# EAGLE board medipix (EAGLE 6.4)
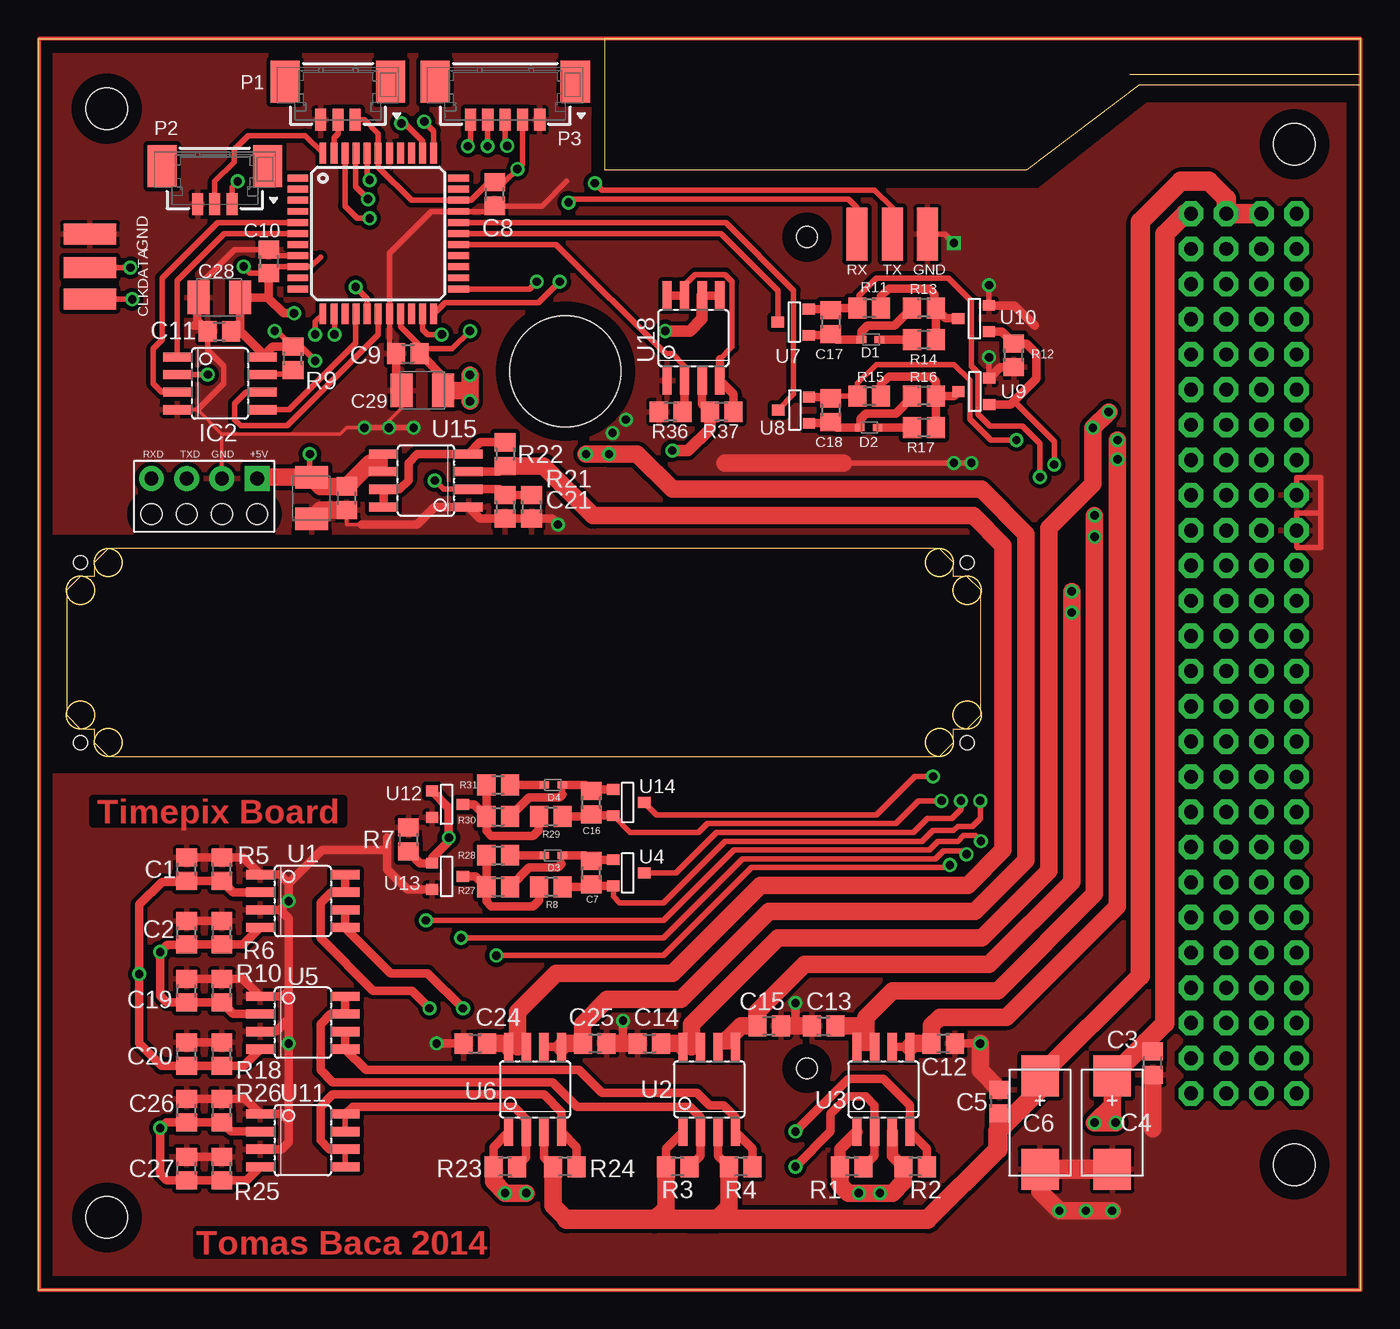
[diagram p0: board, top side]
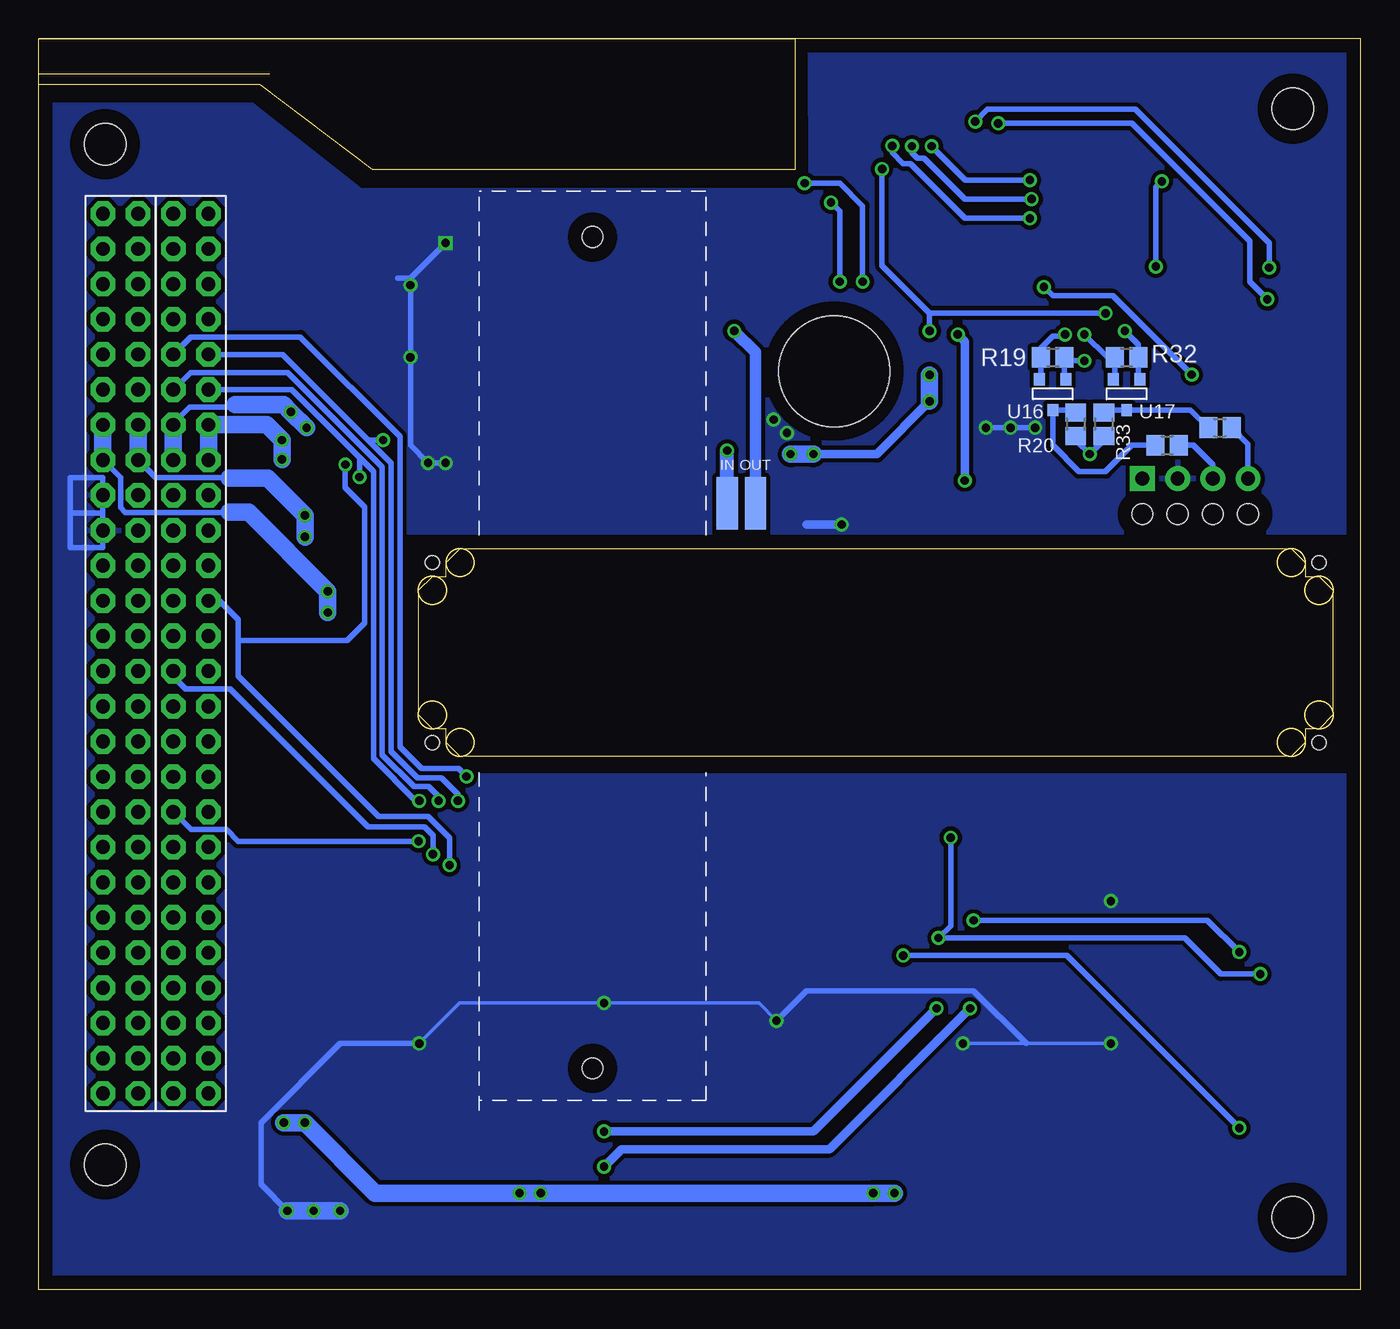
[diagram p1: board, bottom side, seen from below]

Size 95.4 x 90.3 mm. Coordinates in mm from the lower left corner, seen from the top.
Outline: 0,0 95.4,0 95.4,90.3 0,90.3 0,0
Copper layers (1*16): Top 0.034mm / dielectric 1.2mm / Bottom 0.034mm
Design rules "default *": minimum track width 0.12mm, minimum drill 0.2mm, track to track 0.12mm, track to pad 0.12mm, pad to pad 0.12mm, via to via 0.3mm, smd to smd 0.12mm, copper to edge 40mil, drill to drill 8mil, minimum pad ring 10mil, minimum via ring 8mil, stop-mask expansion 4mil, vias tented up to drill 0mil, thermal gap 10mil
Holes 3 mm at 4.9,85.25 4.91,5.23 90.63,9.04 90.63,82.7
Holes 1 mm at 3,39.5 67,39.5 3,52.5 67,52.5
Holes 8 mm at 38,66.3
Holes 1.5 mm at 55.45,16 55.45,76
Milling: area 40.8,80.8 to 95.4,90.3; area 4,38.5 to 6,40.5; area 64,38.5 to 66,40.5; area 4,51.5 to 6,53.5; area 4,51.5 to 6,53.5; area 2,49.5 to 4,51.5; area 2,40.5 to 4,42.5; area 64,51.5 to 66,53.5; area 66,49.5 to 68,51.5; area 66,40.5 to 68,42.5; area 2,38.5 to 68,53.5; 2 lines

## Footprints (pad centres in the part's own frame; a part is rotated, then mirrored left to right if it is on the bottom)
R0805 = smd 1.3 x 1.5: 1 -0.85,0; 2 0.85,0
D = smd 2.95 x 2.7: + 3.375,0; - -3.375,0
SMC_B = smd 1.6 x 2.4: + -1.5,0; - 1.5,0
PIN = smd 1.524 x 3.81: P$1 0,0
SOD523 = smd 0.7 x 0.5: A 0.7,0; C -0.6,0
H-KONEKTOR = drill 1 pad 1.778 octagon: 1 0,0; 2 2.54,0; 3 0,-2.54; 4 2.54,-2.54; 5 0,-5.08; 6 2.54,-5.08; 7 0,-7.62; 8 2.54,-7.62; 9 0,-10.16; 10 2.54,-10.16; 11 0,-12.7; 12 2.54,-12.7; 13 0,-15.24; 14 2.54,-15.24; 15 0,-17.78; 16 2.54,-17.78; 17 0,-20.32; 18 2.54,-20.32; 19 0,-22.86; 20 2.54,-22.86; 21 0,-25.4; 22 2.54,-25.4; 23 0,-27.94; 24 2.54,-27.94; 25 0,-30.48; 26 2.54,-30.48; 27 0,-33.02; 28 2.54,-33.02; 29 0,-35.56; 30 2.54,-35.56; 31 0,-38.1; 32 2.54,-38.1; 33 0,-40.64; 34 2.54,-40.64; 35 0,-43.18; 36 2.54,-43.18; 37 0,-45.72; 38 2.54,-45.72; 39 0,-48.26; 40 2.54,-48.26; 41 0,-50.8; 42 2.54,-50.8; 43 0,-53.34; 44 2.54,-53.34; 45 0,-55.88; 46 2.54,-55.88; 47 0,-58.42; 48 2.54,-58.42; 49 0,-60.96; 50 2.54,-60.96; 51 0,-63.5; 52 2.54,-63.5
TQFP44 = smd 1.5 x 0.5: 1 -5.8,4; 2 -5.8,3.2; 3 -5.8,2.4; 4 -5.8,1.6; 5 -5.8,0.8; 6 -5.8,0; 7 -5.8,-0.8; 8 -5.8,-1.6; 9 -5.8,-2.4; 10 -5.8,-3.2; 11 -5.8,-4; 23 5.8,-4; 24 5.8,-3.2; 25 5.8,-2.4; 26 5.8,-1.6; 27 5.8,-0.8; 28 5.8,0; 29 5.8,0.8; 30 5.8,1.6; 31 5.8,2.4; 32 5.8,3.2; 33 5.8,4 | smd 0.5 x 1.5: 12 -4,-5.8; 13 -3.2,-5.8; 14 -2.4,-5.8; 15 -1.6,-5.8; 16 -0.8,-5.8; 17 0,-5.8; 18 0.8,-5.8; 19 1.6,-5.8; 20 2.4,-5.8; 21 3.2,-5.8; 22 4,-5.8; 34 4,5.8; 35 3.2,5.8; 36 2.4,5.8; 37 1.6,5.8; 38 0.8,5.8; 39 0,5.8; 40 -0.8,5.8; 41 -1.6,5.8; 42 -2.4,5.8; 43 -3.2,5.8; 44 -4,5.8
SOIC08 = smd 0.66 x 2.032: 1 -1.905,-3.073; 2 -0.635,-3.073; 3 0.635,-3.073; 4 1.905,-3.073; 5 1.905,3.073; 6 0.635,3.073; 7 -0.635,3.073; 8 -1.905,3.073
MEDIPIX_CONNECTOR = drill 1 pad 1.8 square: 5V 7.62,0 | drill 1 pad 1.8: GND 5.08,0; P$3 2.54,0; P$4 0,0 | hole 1.5: 0,-2.54; 2.54,-2.54; 5.08,-2.54; 7.62,-2.54
53398-0310 = smd 0.8 x 1.6: 1 1.25,0; 2 0,0; 3 -1.25,0 | smd 2.1 x 3: M1 3.81,2.75; M2 -3.81,2.75
53398-0510 = smd 0.8 x 1.6: 1 2.5,0; 2 1.25,0; 3 0,0; 4 -1.25,0; 5 -2.5,0 | smd 2.1 x 3: M1 5.06,2.75; M2 -5.06,2.75
SOT-23 = smd 0.787 x 0.889: 1 -0.953,-0.953; 2 0.953,-0.953; 3 0,1.27

## Placement (x,y rotation side)
C1  100n  [R0805]  10.67,30.35 90 top
C2  100n  [R0805]  10.67,25.78 90 top
C3  100n  [R0805]  80.39,16.38 90 top
C4  220u  [D]  77.47,12.06 90 top
C5  100n  [R0805]  69.34,13.59 270 top
C6  220u  [D]  72.26,12.06 90 top
C7  15nF  [R0805]  39.88,30.1 90 top
C8  100n  [R0805]  32.9,79.09 90 top
C9  100n  [R0805]  26.64,67.57 0 top
C10  100n  [R0805]  16.6,74.23 270 top
C11  100n  [R0805]  13.04,69.19 0 top
C12  100n  [R0805]  65.28,17.78 180 top
C13  100n  [R0805]  56.64,19.05 0 top
C14  100n  [R0805]  44.07,17.78 0 top
C15  100n  [R0805]  52.7,19.05 180 top
C16  15nF  [R0805]  39.88,35.18 90 top
C17  15nF  [R0805]  57.15,69.85 270 top
C18  15nF  [R0805]  57.15,63.5 270 top
C19  100n  [R0805]  10.67,21.59 90 top
C20  100n  [R0805]  10.67,17.02 90 top
C21  100n  [R0805]  35.56,56.52 270 top
C22  100u  [SMC_B]  19.68,57.15 270 top
C23  100n  [R0805]  22.23,57.15 90 top
C24  100n  [R0805]  31.5,17.78 0 top
C25  100n  [R0805]  40.13,17.78 180 top
C26  100n  [R0805]  10.67,12.95 90 top
C27  100n  [R0805]  10.67,8.76 90 top
C28  100u  [SMC_B]  13.03,71.63 180 top
C29  100u  [SMC_B]  27.69,64.92 180 top
CLK  CLK  [PIN]  3.68,71.5 90 top
D1  BAS70  [SOD523]  60.07,68.58 180 top
D2  BAS70  [SOD523]  59.94,62.23 180 top
D3  BAS70  [SOD523]  37.08,31.37 0 top
D4  BAS70  [SOD523]  37.08,36.45 0 top
DATA  DATA  [PIN]  3.68,73.79 270 top
GND  GND  [PIN]  3.68,76.2 270 top
GND1  GND  [PIN]  64.14,76.2 180 top
H1  H1  [H-KONEKTOR]  83.16,14.18 180 bottom
H2  H2  [H-KONEKTOR]  88.24,14.18 180 bottom
IC1  AVR_XMEGA_A4U44A  [TQFP44]  24.5,76.24 0 top
IC2  FM25H20  [SOIC08]  13.06,65.43 270 top
MP  MEDIPIX_CONNECTOR  [MEDIPIX_CONNECTOR]  8.13,58.55 0 top
P1  53398-0310  [53398-0310]  21.59,84.45 0 top
P2  53398-0310  [53398-0310]  12.7,78.36 0 top
P3  53398-0510  [53398-0510]  33.66,84.45 0 top
R1  100k  [R0805]  58.67,8.89 180 top
R2  100k  [R0805]  63.25,8.89 180 top
R3  100k  [R0805]  46.1,8.89 180 top
R4  100k  [R0805]  50.67,8.89 180 top
R5  100k  [R0805]  13.21,30.35 90 top
R6  100k  [R0805]  13.21,25.78 90 top
R7  100k  [R0805]  26.67,32.51 270 top
R8  100k  [R0805]  36.96,29.08 180 top
R9  100k  [R0805]  18.35,67.23 90 top
R10  100k  [R0805]  13.21,21.59 90 top
R11  100k  [R0805]  59.94,70.87 0 top
R12  100k  [R0805]  70.36,67.46 90 top
R13  330k  [R0805]  63.88,70.87 180 top
R14  1k5  [R0805]  63.88,68.58 180 top
R15  100k  [R0805]  59.94,64.52 0 top
R16  330k  [R0805]  63.88,64.52 180 top
R17  1k5  [R0805]  63.88,62.23 180 top
R18  100k  [R0805]  13.21,17.02 90 top
R19  10k  [R0805]  22.23,67.31 0 bottom
R20  10k  [R0805]  20.57,62.48 270 bottom
R21  100k  [R0805]  33.66,56.52 270 top
R22  100k  [R0805]  33.66,60.33 270 top
R23  100k  [R0805]  33.66,8.89 180 top
R24  100k  [R0805]  37.97,8.89 180 top
R25  100k  [R0805]  13.21,8.76 90 top
R26  100k  [R0805]  13.21,12.95 90 top
R27  330k  [R0805]  33.15,29.08 0 top
R28  1k5  [R0805]  33.15,31.37 0 top
R29  100k  [R0805]  36.96,34.16 180 top
R30  330k  [R0805]  33.15,34.16 0 top
R31  1k5  [R0805]  33.15,36.45 0 top
R32  10k  [R0805]  16.89,67.31 0 bottom
R33  10k  [R0805]  18.54,62.48 270 bottom
R34  1k  [R0805]  10.16,62.23 0 bottom
R35  1k  [R0805]  13.97,60.96 0 bottom
R36  100k  [R0805]  45.59,63.37 180 top
R37  100k  [R0805]  49.28,63.37 180 top
RXD0  RX  [PIN]  59.05,76.2 180 top
TXD0  TX  [PIN]  61.59,76.2 180 top
TXD1  IN  [PIN]  45.72,56.77 0 bottom
TXD2  OUT  [PIN]  43.69,56.77 0 bottom
U1  IRF7313  [SOIC08]  19.05,28.07 270 top
U2  IRF7328  [SOIC08]  48.39,14.48 0 top
U3  IRF7328  [SOIC08]  60.96,14.48 0 top
U4  BSS84  [SOT-23]  42.42,30.1 270 top
U5  IRF7313  [SOIC08]  19.05,19.28 270 top
U6  IRF7328  [SOIC08]  35.81,14.48 0 top
U7  BSS84  [SOT-23]  54.61,69.85 90 top
U8  BSS84  [SOT-23]  54.64,63.5 90 top
U9  BSS138AKA  [SOT-23]  67.64,64.85 90 top
U10  BSS138AKA  [SOT-23]  67.61,70.1 90 top
U11  IRF7313  [SOIC08]  19.05,10.79 270 top
U12  BSS138AKA  [SOT-23]  29.34,35.05 270 top
U13  BSS138AKA  [SOT-23]  29.34,29.84 270 top
U14  BSS84  [SOT-23]  42.42,35.18 270 top
U15  IRF7319  [SOIC08]  27.94,58.42 90 top
U16  BSS138AKA  [SOT-23]  22.23,64.77 180 bottom
U17  BSS138AKA  [SOT-23]  16.89,64.77 180 bottom
U18  IRF7319  [SOIC08]  47.24,68.71 0 top

## Library data of the parts
C1-C29 CLK D1-D4 DATA GND GND1 H1 H2 IC1 IC2 MP R1-R37 RXD0 TXD0 TXD1 TXD2 U1-U18 = medipix
P1-P3 = con-molex-picoblade

## Nets
+3.3V: C8.2 C9.2 C10.2 C11.2 C25.2 C28.+ C29.+ IC1.9 IC1.19 IC1.31 IC1.39 IC2.8 P1.1 P2.1 P3.2 R9.2 R19.2 R32.2 U6.5 U6.6 U16.1 U17.1
+3.3V-FIPEX: C14.2 H1.38 H1.40 U2.7 U2.8
+3.3V-IN: C5.2 C6.+ H1.52 H2.51 R3.2 R4.2 R24.2 U2.1 U2.3 U6.3
+3.3V-MEASURE: C15.2 H2.38 H2.40 U2.5 U2.6
+5V: C24.2 R22.2 U6.7 U6.8 U15.3
+5V-FIPEX: C12.2 H1.37 H1.39 U3.5 U3.6
+5V-IN: C3.2 C4.+ H1.51 R1.2 R2.2 R23.2 U3.1 U3.3 U6.1
+5V-MEASURE: C13.2 H2.37 H2.39 U3.7 U3.8
+5V-MEDIPIX: C22.+ C23.2 MP.5V R20.2 R33.2 U15.5 U15.6
CS: IC1.6 IC2.1
FIPEX-ON: C2.1 C19.1 H1.18 R6.1 R10.1 U1.4 U5.2
FIPEX_3_GATE: R3.1 U2.2 U5.7 U5.8
FIPEX_5_GATE: R2.1 U1.5 U1.6 U3.4
GNDD: C1.2 C2.2 C3.1 C4.- C5.1 C6.- C8.1 C9.1 C10.1 C11.1 C12.1 C13.1 C14.1 C15.1 C19.2 C20.2 C21.2 C22.- C23.1 C24.1 C25.1 C26.2 C27.2 C28.- C29.- GND1.P$1 GND.P$1 H2.34 H2.36 IC1.8 IC1.18 IC1.30 IC1.38 IC2.4 MP.GND P1.3 P2.3 P3.1 R5.2 R6.2 R7.1 R10.2 R12.1 R18.2 R21.2 R25.2 R26.2 R36.2 U1.1 U1.3 U5.1 U5.3 U9.2 U10.2 U11.1 U11.3 U12.2 U13.2 U15.1 U18.1
I2C-SCL-OBC: C16.1 C18.1 H1.43 R15.1 R29.1 U8.2 U14.2
I2C-SDA-OBC: C7.1 C17.1 H1.41 R8.1 R11.1 U4.2 U7.2
MEASURE-ON: C1.1 C20.1 H1.26 R5.1 R7.2 R18.1 U1.2 U5.4 U12.1 U13.1
MEASURE_3_GATE: R4.1 U2.4 U5.5 U5.6
MEASURE_5_GATE: R1.1 U1.7 U1.8 U3.2
MEDIPIX-SW: C21.1 IC1.21 R21.1 U15.2
MEDIPIX-SW2: IC1.27 R36.1 U18.2
MEDIPIX_GATE: R22.1 U15.4 U15.7 U15.8
MEDIPIX_GATE2: R37.1 U18.4 U18.7 U18.8
MISO: IC1.16 IC2.2
MOSI: IC1.15 IC2.5
MPX2.2IN: R37.2 TXD1.P$1 U18.3
MPX2.2OUT: TXD2.P$1 U18.5 U18.6
N$2: D3.C R28.2
N$3: C7.2 D3.A R27.2 U4.1
N$4: D2.C R17.2
N$5: D1.C R14.2
N$6: C17.2 D1.A R13.2 U7.1
N$7: C18.2 D2.A R16.2 U8.1
N$8: IC2.7 R9.1
N$9: MP.P$4 R34.2
N$10: IC1.23 TXD0.P$1
N$11: IC1.22 RXD0.P$1
N$17: D4.C R31.2
N$18: C16.2 D4.A R30.2 U14.1
PA0: IC1.40 P3.5
PA1: IC1.41 P3.4
PA2: IC1.42 P3.3
PA3: IC1.43 P1.2
PA4: IC1.44 P2.2
PA5: IC1.1
PA6: IC1.2
PA7: IC1.3
PDI_CLK: CLK.P$1 IC1.35
PDI_DATA: DATA.P$1 IC1.34
RXD0: IC1.12 R32.1 U17.2
RXDM: R20.1 R35.1 U16.3
RXDMMM: MP.P$3 R35.2
SCK: IC1.17 IC2.6
SCL: IC1.29 U8.3
SCL2_GATE: R29.2 R30.1 R31.1 U12.3
SCL-MEASURE: H1.44 U14.3
SCL_GATE: R15.2 R16.1 R17.1 U9.3
SDA: IC1.28 U7.3
SDA2_GATE: R8.2 R27.1 R28.1 U13.3
SDA-MEASURE: H1.42 U4.3
SDA_GATE: R11.2 R13.1 R14.1 U10.3
TIMEPIX-ON: C26.1 C27.1 H1.29 R12.2 R25.1 R26.1 U9.1 U10.1 U11.2 U11.4
TIMEPIX_3_GATE: R24.1 U6.4 U11.5 U11.6
TIMEPIX_5_GATE: R23.1 U6.2 U11.7 U11.8
TXD0: IC1.13 R19.1 U16.2
TXDM: R33.1 R34.1 U17.3
WP: IC1.5 IC2.3

## Tracks (layer width: path | path; a pad name or v marks a point on that pad's centre or on a via)
+3.3V  (via drill 0.6)
  Top 0.406: C10.2 17.05,73.84 IC1.9 19.61,73.84 20.32,74.55 | IC1.19 26.1,69.53 27.49,68.14 C9.2 | 14.28,69.19 C11.2 | 27.75,67.31 C9.2 | 16.6,72.3 C10.2 | C9.2 27.84,67.92 29.82,67.92 v31.11,69.22 | C8.2 32.49,79.94 31.2,78.64 IC1.31 26.89,78.64 24.5,81.03 IC1.39 24.5,83.45 23.5,84.45 P1.1 | C8.2 33.47,79.94 | C8.2 33.58,79.94 v34.54,80.9 34.91,81.26 P3.2 | v19.94,67.06 18.91,68.08 R9.2 17.21,69.22 v17.02,69.22 | 13.84,78.47 P2.1 13.95,79.61 v14.35,80.01 | C10.2 15.26,73.38 v14.78,73.86
  Top 0.61: U6.6 U6.5 | 27.75,67.31 29.19,65.88 C29.+ | C11.2 14.53,69.19 | 14.53,69.19 C28.+ 16.51,71.63 | 16.51,71.63 16.6,71.63 C10.2 | v18.41,70.48 17.65,70.48 16.51,71.63 | R9.2 16.88,68.08 IC2.8 16.14,67.58 14.53,69.19
  Top 1.27: U6.5 37.95,17.78 C25.2 39.24,17.82 39.24,19.18 41.02,20.95 46.35,20.95 52.7,27.3 67.56,27.3 71.25,30.99 71.25,54.56 68.02,57.78 45.72,57.78 43.18,60.33 v41.15,60.33 v39.5,60.33 | v31.11,64.14 v31.11,66.04 31.11,64.92 C29.+
  Bottom 0.406: v18.41,70.48 31.11,70.48 | v31.11,69.22 31.11,70.48 | 31.11,70.48 34.54,73.91 v34.54,80.9 | U16.1 21.38,65.83 R19.2 21.12,67.06 v19.94,67.06 | U17.1 16.04,65.83 R32.2 16.04,68.24 v17.02,69.22 | v14.78,73.86 14.78,79.58 v14.35,80.01
  Bottom 0.61: v31.11,64.14 34.92,60.33 v39.5,60.33
  Bottom 1.27: v31.11,66.04 v31.11,64.14 | v39.5,60.33 v41.15,60.33
+3.3V-FIPEX  (via drill 0.6)
  Top 0.406: U2.7 47.14,17.55 47.12,17.53
  Top 0.61: U2.8 U2.7 | 46.48,17.4 U2.8 | U2.8 46.51,17.53
  Top 1.27: U2.8 46.25,17.78 C14.2 | 47.12,17.53 47.12,19.18 53.34,25.4 68.07,25.4 72.9,30.23 72.9,54.99 76.07,58.17 v76.07,62.23 v77.22,63.37
  Bottom 0.406: 85.7,62.89 H1.40 85.7,62.51 84.51,63.7 81.84,63.7 81.64,63.91 79.63,63.91
  Bottom 1.27: H1.38 H1.40 | v76.07,62.23 v77.22,63.37 77.75,63.91 79.63,63.91 81.23,63.91
+3.3V-IN
  Top 0.61: R24.2 36.45,9.56 U6.3 | U2.3 49.02,9.69 R4.2 | U2.1 45.25,10.17 R3.2
  Top 1.27: R24.2 37.12,6.06 38.1,5.08 | 44.45,5.08 45.25,5.88 | 48.9,5.08 49.82,6.01 | 69.22,11.43 69.22,12.61 C5.2 | R3.2 45.25,5.08 46.99,5.08 | R4.2 49.82,5.08 48.26,5.08
  Top 1.422: H2.51 H1.52 85.7,78.77 84.45,80.01 82.42,80.01 79.5,77.09 79.5,22.68 C6.+ 72.26,14.48 69.22,11.43 69.22,10.16 64.14,5.08 48.9,5.08 48.26,5.08 47.62,5.08 46.99,5.08 44.45,5.08 38.1,5.08
+3.3V-MEASURE  (via drill 0.6)
  Top 0.406: U2.6 U2.5 49.66,17.55 49.66,18.03
  Top 1.27: 49.66,18.03 50.67,19.05 C15.2 51.82,19.09 51.82,20.07 55.24,23.5 68.58,23.5 74.55,29.46 74.55,29.59 74.55,32.38 v74.55,48.9 v74.55,50.42
  Bottom 0.406: 81.66,56.13 81.69,56.11 89.15,56.11 89.51,56.46 89.51,58.63 H2.38
  Bottom 1.27: v74.55,48.9 v74.55,50.42 80.26,56.13 80.39,56.13 81.28,56.13 81.66,56.13 | H2.38 H2.40
+5V
  Top 0.305: U6.8 33.93,17.53 34.54,17.53
  Top 0.406: U6.7 U6.8
  Top 0.61: U6.7 35.15,17.53 34.54,17.53 | U15.3 33.23,59.05 R22.2
  Top 1.27: U6.8 33.68,17.78 C24.2 | 34.54,17.53 34.54,20.07 37.34,22.86 45.72,22.86 52.07,29.21 67.06,29.21 69.6,31.75 69.6,53.72 67.44,55.88 40.01,55.88 36.41,59.48 R22.2
+5V-FIPEX  (via drill 0.6, 0.6 pad 0.41)
  Top 0.61: U3.6 U3.5
  Top 1.27: U3.5 63.09,17.78 C12.2 64.43,19.09 65.02,19.68 69.85,19.68 77.85,27.69 77.85,27.72 77.85,28.57 v77.85,59.94 v77.85,61.34
  Bottom 1.27: H1.37 H1.39 78.95,62.44 v77.85,61.34 v77.85,59.94
+5V-IN  (via drill 0.6)
  Top 0.406: U3.3 61.47,11.53
  Top 0.61: U6.1 32.8,10.3 R23.2
  Top 0.813: R2.2 61.59,9.69 U3.3 | U3.1 57.82,10.17 R1.2
  Top 1.27: R1.2 57.82,7.58 58.42,6.99 v59.18,6.99 v60.71,6.99 61.59,6.99 62.4,7.79 R2.2 | 77.47,12.06 v76.2,12.06 77.47,13.34 | 77.47,12.06 v77.72,12.06 | 77.47,13.34 C4.+ | v35.18,6.99 v33.66,6.99 32.8,7.83 R23.2 | C3.2 80.39,17.4 79.91,17.88 | 77.47,12.06 77.47,13.34
  Top 1.422: H1.51 82.76,77.68 81.28,76.2 81.28,19.25 79.91,17.88 C4.+
  Bottom 1.27: v77.72,12.06 v76.2,12.06 71.12,6.99 v60.71,6.99 v59.18,6.99 v35.18,6.99 v33.66,6.99
+5V-MEASURE  (via drill 0.6 pad 0.41)
  Top 0.406: 59.69,17.55 59.69,18.41
  Top 0.61: U3.8 59.69,17.55 U3.7 | 57.72,18.82 C13.2
  Top 1.27: 58.22,19.05 C13.2 59.05,19.05 59.69,18.41 59.69,19.68 61.59,21.59 69.22,21.59 76.2,28.57 v76.2,54.36 v76.2,55.91
  Bottom 0.406: 81.66,58.6 81.69,58.62 86.96,58.62 H2.37
  Bottom 1.27: v76.2,54.36 v76.2,55.91 78.89,58.6 81.66,58.6 | H2.37 H2.39
+5V-MEDIPIX  (via drill 0.6)
  Top 0.406: C22.+ 19.56,58.78 v19.56,60.33
  Top 0.61: U15.5 U15.6 24.23,59.69 24.13,59.69
  Top 1.27: MP.5V 15.85,58.65 C22.+ 20.34,58 C23.2 23.91,59.69 24.13,59.69
  Bottom 0.406: R33.2 18.54,61.34 v19.56,60.33 20.57,61.34 R20.2
CS
  Top 0.406: IC2.1 9.99,72.85 13.38,76.24 IC1.6
FIPEX-ON  (via drill 0.6)
  Top 0.406: 10.63,20.7 C19.1 | v27.94,26.67 45.09,26.67 50.16,31.75 64.26,31.75 64.9,32.38 66.32,32.38 66.73,32.79 67.59,32.79 v68,32.38
  Top 0.61: U1.4 14.75,24.93 R6.1 C2.1 10.63,24.89 9.27,24.89 v8.76,24.38 8.76,21.21 9.23,20.74 C19.1 R10.1 14.03,19.91 U5.2
  Bottom 0.406: 9.02,24.13 v8.76,24.38 11.05,26.67 v27.94,26.67 | H1.18 84.42,33.22 81.86,33.22 81.03,32.38 v68,32.38
FIPEX_3_GATE
  Top 0.61: R3.1 47.75,9.69 U2.2 47.75,12.45 46.99,13.21 38.86,13.21 37.08,14.99 21.21,14.99 20.32,15.88 20.32,19.18 21.06,19.91 U5.7 U5.8
FIPEX_5_GATE  (via drill 0.6)
  Top 0.61: U1.6 U1.5 | U1.5 22.25,26.29 | R2.1 64.1,10.17 U3.4 62.87,13.34 60.96,15.24 58.42,15.24 v54.61,11.43 | 22.23,26.16 U1.5 | v30.61,20.32 28.07,22.86 25.4,22.86 22.12,26.14 U1.5
  Bottom 0.61: v30.61,20.32 39.5,11.43 v54.61,11.43
GNDD  (via drill 0.6)
  Top 0.254: v18.03,17.78 18.03,20.32 | U10.2 68.57,71.13 | IC2.4 11.45,63.52 13.21,61.77 | MP.GND 13.21,61.77 | C29.- 26.19,63.65 24.77,62.23 24.13,62.23 v23.5,62.23 22.23,62.23 21.76,61.77 13.21,61.77 | C23.1 22.23,55.24 23.28,55.24
  Top 0.406: IC1.8 17.04,74.64 C10.1 14.12,75.08 11.53,72.49 C28.- | 11.45,63.52 13.34,65.41 13.34,66.67 12.19,67.82 C11.1 | 38.1,80.01 36.33,78.24 C8.1 32.51,77.84 IC1.30 28.31,77.84 25.3,74.83 IC1.18 25.3,68.06 C9.1 | GND1.P$1 65.41,76.2 v66.04,75.56 | 49.4,59.82 49.53,59.69 | 24.13,62.23 v25.27,62.23 v27.05,62.23 v23.5,62.23 | v68.58,72.52 U10.2 | 58.09,59.69 v66.04,59.69 v67.31,59.69 | v68.58,67.31 68.58,66.04 | H2.36 90.78,58.62 92.53,58.62 92.53,53.59 90.83,53.59 90.78,53.65 90.78,56.08 92.38,56.08
  Top 0.61: C1.2 R5.2 14.75,31.2 U1.1 17.4,29.97 18.03,29.34 | U1.3 17.4,27.43 | 17.4,27.43 v18.03,28.07 18.03,29.34 | R6.2 C2.2 | C19.2 R10.2 14.72,22.44 U5.1 17.63,21.18 18.03,21.59 | R18.2 C20.2 | 17.4,27.43 18.03,26.8 18.03,21.59 | 18.03,19.56 18.03,20.32 18.03,21.59 | U5.3 17.12,18.64 18.03,19.56 | C26.2 R26.2 14.87,13.8 U11.1 17.53,12.7 18.03,12.19 | R25.2 C27.2 | U13.2 26.61,28.89 25.15,30.35 25.15,31.75 | 25.15,31.75 25.15,32.64 | U10.2 70.42,71.06 71.88,69.6 | 70.42,66.55 R12.1 | U11.3 17.53,10.16 18.03,10.67 18.03,12.19 | 18.03,19.56 v18.03,17.78 18.03,12.19 | C24.1 v28.7,17.78 | 41.91,17.78 42.16,18.03 v42.16,19.43 | 54.61,19.05 v54.61,20.7 | C12.1 v67.94,17.78 | C29.- 25.79,65.31 C9.1 | 70.6,66.61 R12.1 | 23.28,55.24 27.3,55.24 28.57,56.52 U15.1 31.86,55.66 R21.2 C21.2 37.05,55.66 v37.47,55.24 | 18.03,29.34 20.45,31.75 25.15,31.75 | C28.- 11.53,71.22 11.43,71.12 11.43,69.94 C11.1 11.78,69.6 11.18,69.6 | U9.2 69.41,66.61 R12.1
  Top 1.27: C25.1 41.91,17.78 C14.1 | C15.1 54.61,19.05 C13.1 | C22.- 20.34,56.3 C23.1 | 58.09,59.69 49.53,59.69 | 80.39,11.61 C3.1 | C5.1 67.94,15.84 v67.94,17.78 | C6.- 72.26,7.11 v73.66,5.71 | v75.56,5.71 v73.66,5.71 | v73.66,5.71 v77.47,5.71
  Top 1.422: C6.- C4.-
  Bottom 0.254: v28.7,17.78 24.13,17.78 v18.03,17.78 | v67.94,17.78 65.02,20.7 v54.61,20.7 43.43,20.7 v42.16,19.43
  Bottom 0.406: 24.13,17.78 27.94,21.59 40.01,21.59 v42.16,19.43 | v66.04,75.56 68.57,73.04 | v27.05,62.23 v25.27,62.23 v23.5,62.23 | 68.57,73.04 69.51,73.04 | 68.57,73.04 68.57,72.53 v68.58,72.52 v68.58,67.31 68.58,60.96 v67.31,59.69 v66.04,59.69 | v77.47,5.71 79.38,7.62 79.38,12.06 73.66,17.78 v67.94,17.78 | H2.34 H2.36 90.78,58.62 93.14,58.62 93.14,56.08 | 93.14,56.08 93.14,53.59 90.78,53.59 90.78,56.08 | 90.78,57.17 90.78,56.08 | 90.78,56.08 93.14,56.08
  Bottom 0.61: v37.47,55.24 40.01,55.24
  Bottom 1.27: v73.66,5.71 v75.56,5.71 v77.47,5.71
  other vias: 42.37,62.81 41.4,61.85
  pour Bottom (isolate 0.3): 0,0 95.25,0 95.25,85.5 80.01,85.5 72.16,79.35 39.67,79.32 39.7,90.12 0,90.17 -0.05,54.71 69.16,54.71 69.01,37.08 -0.2,37.08
  pour Top (isolate 0.3): 0,0 95.25,0 95.25,85.5 80.01,85.5 72.16,79.35 39.67,79.32 39.7,90.12 0,90.17 -0.05,54.71 69.16,54.71 69.01,37.08 -0.2,37.08
I2C-SCL-OBC  (via drill 0.6)
  Top 0.406: U14.2 42.67,33.02 47.62,33.02 48.26,33.66 61.85,33.66 63.5,35.31 v65.15,35.31 | C18.1 57.32,64.52 R15.1 59.09,65.44 60.45,66.8 66.04,66.8 67.18,65.66 67.18,62.87 68.71,61.34 v70.56,61.34
  Top 0.61: U8.2 57.05,64.45 C18.1 | R29.1 39.71,34.16 C16.1 39.98,34.23 U14.2
  Bottom 0.406: v65.15,35.31 65.15,35.76 66.34,36.96 68.07,36.96 69.98,38.86 69.98,59.69 71.63,61.34 | H1.43 77.81,67.52 71.63,61.34 | 71.63,61.34 v70.56,61.34
I2C-SDA-OBC  (via drill 0.6)
  Top 0.406: U4.2 41.47,28.38 41.91,27.94 45.09,27.94 49.53,32.38 63.75,32.38 64.52,33.15 66.02,33.15 66.32,33.45 67.39,33.45 67.94,34.01 v67.94,35.31 | v72.26,58.67 72.26,61.09 70.99,62.36 68.63,62.36 67.77,63.22 67.77,66.22 67.31,66.67 67.31,71.37 65.66,73.03 60.45,73.03 59.18,71.75 59.18,70.95 R11.1
  Top 0.61: U7.2 57.05,70.8 C17.1 57.32,70.87 R11.1 | 39.88,29.21 C7.1 | R8.1 39.71,29.08 C7.1 | U4.2 39.98,29.15 C7.1
  Bottom 0.406: v67.94,35.31 68.2,35.31 71.25,38.35 71.25,59.05 72.26,60.07 | H1.41 77.17,64.98 72.26,60.07 | v72.26,58.67 72.26,60.07
MEASURE-ON  (via drill 0.6)
  Top 0.406: v30.48,25.4 45.09,25.4 50.8,31.11 64.69,31.11 65.28,31.7 66.7,31.7 v66.95,31.45
  Top 0.61: U1.2 14.01,28.7 R5.1 C1.1 10.63,29.46 8.89,29.46 7.24,27.81 v7.24,22.79 7.24,17.78 8.85,16.17 C20.1 R18.1 14.77,16.17 U5.4 | U12.1 29.59,34.8 v29.59,32.64 29.59,32.38 28.38,31.18 U13.1 27.54,30.8 R7.2
  Bottom 0.406: 7.3,22.86 v7.24,22.79 10.09,22.79 12.7,25.4 v30.48,25.4 29.59,26.29 v29.59,32.64 | H1.26 85.7,44.27 84.81,43.38 81.61,43.38 71.63,33.4 67.56,33.4 66.95,32.79 v66.95,31.45
MEASURE_3_GATE
  Top 0.406: U2.4 50.29,12.45
  Top 0.61: U2.4 51.52,10.17 R4.1 | U5.6 U5.5 23.62,15.88 38.99,15.88 40.64,14.22 47.5,14.22 48.39,13.34 49.4,13.34 50.29,12.45
MEASURE_5_GATE  (via drill 0.6)
  Top 0.61: U1.8 U1.7 21.08,28.7 20.32,27.94 20.32,25.4 24.13,21.59 26.92,21.59 v28.19,20.32 | R1.1 60.33,9.69 U3.2 60.33,13.34 59.69,13.97 58.42,13.97 57.15,12.7 57.15,11.43 v54.61,8.89
  Bottom 0.61: v54.61,8.89 53.34,10.16 38.35,10.16 v28.19,20.32
MEDIPIX-SW  (via drill 0.6)
  Top 0.406: U15.2 29.21,57.78 v28.57,58.42 | IC1.21 27.7,69.33 28.07,68.96 v29.08,68.96
  Top 0.61: U15.2 33.23,57.78 R21.1 C21.1
  Bottom 0.61: v28.57,58.42 28.57,68.45 v29.08,68.96
MEDIPIX-SW2
  Top 0.406: IC1.27 37.33,75.44 45.21,67.56 45.72,67.56 46.61,66.67 U18.2
  Top 0.61: 46.57,65.59 U18.2 46.61,63.54 R36.1
MEDIPIX_GATE
  Top 0.61: U15.8 U15.7 26.04,57.78 26.67,58.42 26.67,59.69 27.3,60.33 U15.4 31.86,61.17 R22.1
MEDIPIX_GATE2
  Top 0.406: 49.15,67.18 50.04,68.07 50.04,72.77 49.53,73.28 47.37,73.28 46.61,72.52 U18.7
  Top 0.61: R37.1 50.13,64.66 U18.4 49.15,67.18 | U18.8 U18.7
MISO  (via drill 0.6)
  Top 0.406: IC2.2 v12.19,66.06 | IC1.16 23.7,71.55 v22.86,72.39
  Bottom 0.406: v12.19,66.06 17.88,71.75 22.23,71.75 v22.86,72.39
MOSI
  Top 0.406: IC2.5 18.05,63.52 22.86,68.33 22.86,70.4 IC1.15
MPX2.2IN  (via drill 0.6)
  Top 0.61: U18.3 47.88,63.92 R37.2
  Top 0.813: v45.72,60.58 46.86,60.58 48.43,62.14 R37.2
  Bottom 1.016: TXD1.P$1 v45.72,60.58
MPX2.2OUT  (via drill 0.6)
  Top 0.61: U18.5 U18.6
  Top 0.813: U18.6 47.88,70.1 46.99,69.22 v45.21,69.22
  Bottom 0.813: TXD2.P$1 43.69,67.69 v45.21,69.22
N$1
  Top 0.305: 0,0 95.4,0 95.4,90.3 0,90.3 0,0
N$2
  Top 0.61: R28.2 D3.C
N$3
  Top 0.406: D3.A 37.72,31.3 37.72,30.73
  Top 0.61: R27.2 35.39,30.48 37.47,30.48 37.72,30.73 | U4.1 39.98,31.05 C7.2 39.46,31.37 D3.A
N$4
  Top 0.61: R17.2 D2.C
N$5
  Top 0.61: R14.2 D1.C
N$6
  Top 0.61: U7.1 57.05,68.9 C17.2 57.57,68.58 D1.A 59.37,69.15 59.82,69.6 61.76,69.6 R13.2
N$7
  Top 0.61: U8.1 57.05,62.55 C18.2 57.57,62.23 D2.A 59.31,62.3 59.31,62.87 59.69,63.25 61.85,63.25 63.03,64.43 R16.2
N$8
  Top 0.406: 16.17,66.1 18.06,66.1 R9.1
  Top 0.61: IC2.7 16.17,66.1
N$9
  Bottom 0.406: MP.P$4 8.13,61.05 R34.2
N$10  (via drill 0.6)
  Top 0.406: IC1.23 35.41,72.24 v35.94,72.77 | v40.13,79.88 40.64,79.38 60.33,79.38 61.59,78.11 TXD0.P$1 61.59,75.56
  Bottom 0.406: v40.13,79.88 37.59,79.88 35.94,78.23 v35.94,72.77
N$11  (via drill 0.6)
  Top 0.406: IC1.22 29.31,71.25 36.07,71.25 v37.59,72.77 | v38.23,78.49 38.48,78.74 58.42,78.74 59.05,78.11 RXD0.P$1 | 59.05,76.83 RXD0.P$1 | RXD0.P$1 59.05,74.93
  Bottom 0.406: v37.59,72.77 37.59,77.85 v38.23,78.49
N$17
  Top 0.61: R31.2 D4.C
N$18
  Top 0.406: 37.78,35.75 D4.A
  Top 0.61: R30.2 35.39,35.56 37.59,35.56 37.78,35.75 | D4.A 39.46,36.45 C16.2 39.98,36.13 U14.1
PA0  (via drill 0.6)
  Top 0.406: 31.11,84.42 P3.5 31.16,82.74 v30.96,82.55 | IC1.40 23.7,80.29 v23.88,80.11
  Bottom 0.406: v23.88,80.11 28.52,80.11 v30.96,82.55
PA1  (via drill 0.6)
  Top 0.406: v32.38,82.55 32.38,84.44 P3.4 | IC1.41 22.86,82 22.86,79.63 v23.75,78.74
  Bottom 0.406: v23.75,78.74 28.57,78.74 31.52,81.69 31.98,81.69 32.38,82.09 v32.38,82.55
PA2  (via drill 0.6)
  Top 0.406: v33.81,82.58 33.66,82.73 P3.3 | IC1.42 22.1,78.23 22.99,77.34 v23.88,77.34
  Bottom 0.406: v23.88,77.34 28.57,77.34 32.51,81.28 33.02,81.28 33.81,82.07 v33.81,82.58
PA3
  Top 0.406: IC1.43 21.3,83.15 21.59,83.44 P1.2
PA4
  Top 0.406: P2.2 12.7,80.01 14.1,81.41 14.1,82.3 15.11,83.31 19.23,83.31 IC1.44
PDI_CLK  (via drill 0.6)
  Top 0.406: IC1.35 27.7,82.92 26.42,84.2 v26.16,84.2 | CLK.P$1 v6.73,71.5
  Bottom 0.406: v26.16,84.2 16.51,84.2 8,75.69 8,72.77 v6.73,71.5
PDI_DATA  (via drill 0.6)
  Top 0.406: DATA.P$1 v6.6,73.79 | IC1.34 28.5,83.64 v27.81,84.33
  Bottom 0.406: v27.81,84.33 26.92,85.22 16.26,85.22 6.6,75.56 v6.6,73.79
RXD0  (via drill 0.6)
  Top 0.406: v19.94,68.96 19.94,69.88 IC1.12
  Bottom 0.406: U17.2 17.74,65.83 R32.1 18.29,67.31 v19.94,68.96
RXDM
  Bottom 0.406: R20.1 20.74,63.5 U16.3 22.23,60.96 20.32,59.05 18.41,59.05 16.51,60.96 R35.1
RXDMMM
  Bottom 0.406: MP.P$3 10.67,59.56 12.06,60.96 R35.2
SCK
  Top 0.406: IC2.6 14.96,64.79 14.15,63.98 14.15,62.79 14.55,62.38 17.93,62.38 24.5,68.95 24.5,69.47 IC1.17
SCL
  Top 0.406: IC1.29 49.58,77.04 54.48,72.14 54.48,64.64 53.34,63.5
  Top 0.61: U8.3 53.34,63.5
SCL2_GATE
  Top 0.61: R30.1 R31.1 | R30.1 32.3,33.11 32.64,32.77 35.69,32.77 36.07,33.15 36.07,34.12 R29.2 | U12.3 31.41,35.05 R30.1
SCL-MEASURE  (via drill 0.6)
  Top 0.406: U14.3 44.58,34.29 60.45,34.29 63.22,37.06 v64.54,37.06
  Bottom 0.406: v64.54,37.06 65.1,37.62 67.77,37.62 69.34,39.19 69.34,61.59 76.53,68.78 84.44,68.78 H1.44
SCL_GATE
  Top 0.61: R15.2 60.79,65.37 61.34,65.91 64.39,65.91 64.73,65.57 R16.1 | R17.1 R16.1 | R16.1 66.04,64.52 U9.3
SDA
  Top 0.406: 30.34,76.2 IC1.28 49.23,76.24 53.34,72.14 U7.3
SDA2_GATE
  Top 0.61: R27.1 32.3,28.03 32.64,27.69 35.69,27.69 36.11,28.11 R8.2 | R27.1 R28.1 | U13.3 31.54,29.84 R27.1
SDA-MEASURE  (via drill 0.6)
  Top 0.406: U4.3 45.97,30.1 48.9,33.02 63.12,33.02 64.14,34.04 65.91,34.04 66.55,34.67 v66.55,35.31
  Bottom 0.406: v66.55,35.31 66.55,35.61 67.26,36.32 68.33,36.32 70.61,38.61 70.61,59.38 77.44,66.22 84.46,66.22 H1.42
SDA_GATE
  Top 0.305: 66.29,70.16 U10.3
  Top 0.61: R13.1 R14.1 | R13.1 64.64,70.95 64.64,71.88 64.26,72.26 61.34,72.26 60.79,71.72 R11.2 | 66.29,70.16 65.44,70.16 R13.1
TIMEPIX-ON  (via drill 0.6)
  Top 0.406: 10.58,12.19 C26.1 | v33.02,24.13 45.09,24.13 51.44,30.48 65.58,30.48 v65.76,30.66 | U9.1 | v73.28,59.56 73.28,61.21 70.36,64.14
  Top 0.61: U11.2 13.88,11.43 R26.1 C26.1 9.18,12.1 v8.76,11.68 8.76,8.38 9.23,7.91 C27.1 R25.1 15,7.91 U11.4 | 69.15,69.15 U10.1 69.52,69.15 R12.2 71.26,68.31 72.01,67.56 72.01,65.79 70.36,64.14 70.12,63.89 U9.1
  Bottom 0.406: v33.02,24.13 21.21,24.13 v8.76,11.68 | v65.76,30.66 65.76,32.61 67.31,34.16 70.87,34.16 81.03,44.32 81.03,46.99 | 81.03,46.99 80.9,46.86 73.15,46.86 71.88,48.13 71.88,56.52 73.28,57.91 v73.28,59.56 | 81.03,46.99 81.03,48.39 82.38,49.74 H1.29
TIMEPIX_3_GATE
  Top 0.406: U11.5 U11.6
  Top 0.61: R24.1 38.82,10.3 U6.4 37.72,12.83 36.45,14.1 21.21,14.1 20.32,13.21 20.32,10.79 20.95,10.16 U11.6
TIMEPIX_5_GATE
  Top 0.406: U11.7 U11.8
  Top 0.61: R23.1 35.18,9.56 U6.2 35.18,12.32 34.29,13.21 22.63,13.21 U11.8
TXD0  (via drill 0.6)
  Top 0.406: v21.34,68.96 21.34,70.41 IC1.13
  Bottom 0.406: U16.2 23.07,65.83 R19.1 23.07,67.98 22.23,68.83 21.46,68.83 v21.34,68.96
TXDM
  Bottom 0.406: R33.1 18.38,63.5 U17.3 12.28,63.5 R34.1
WP
  Top 0.406: IC2.3 8.87,64.79 8.26,65.41 8.26,67.94 8.89,68.58 8.89,73.03 12.91,77.04 IC1.5

## Text on the board
Top: Timepix Board | Tomas Baca 2014
tNames: RXD | TXD | GND | +5V